# Altium PCB Microprocessor Module (328).PcbDoc
Units mil, origin at the board's own origin, x right, y up, seen from the top; angles counter-clockwise.
Board outline 3176.85 x 3001.61 mil, 2 copper layers (Top Layer, Bottom Layer); 28 components, 41 nets, 148 pads, 5 vias.
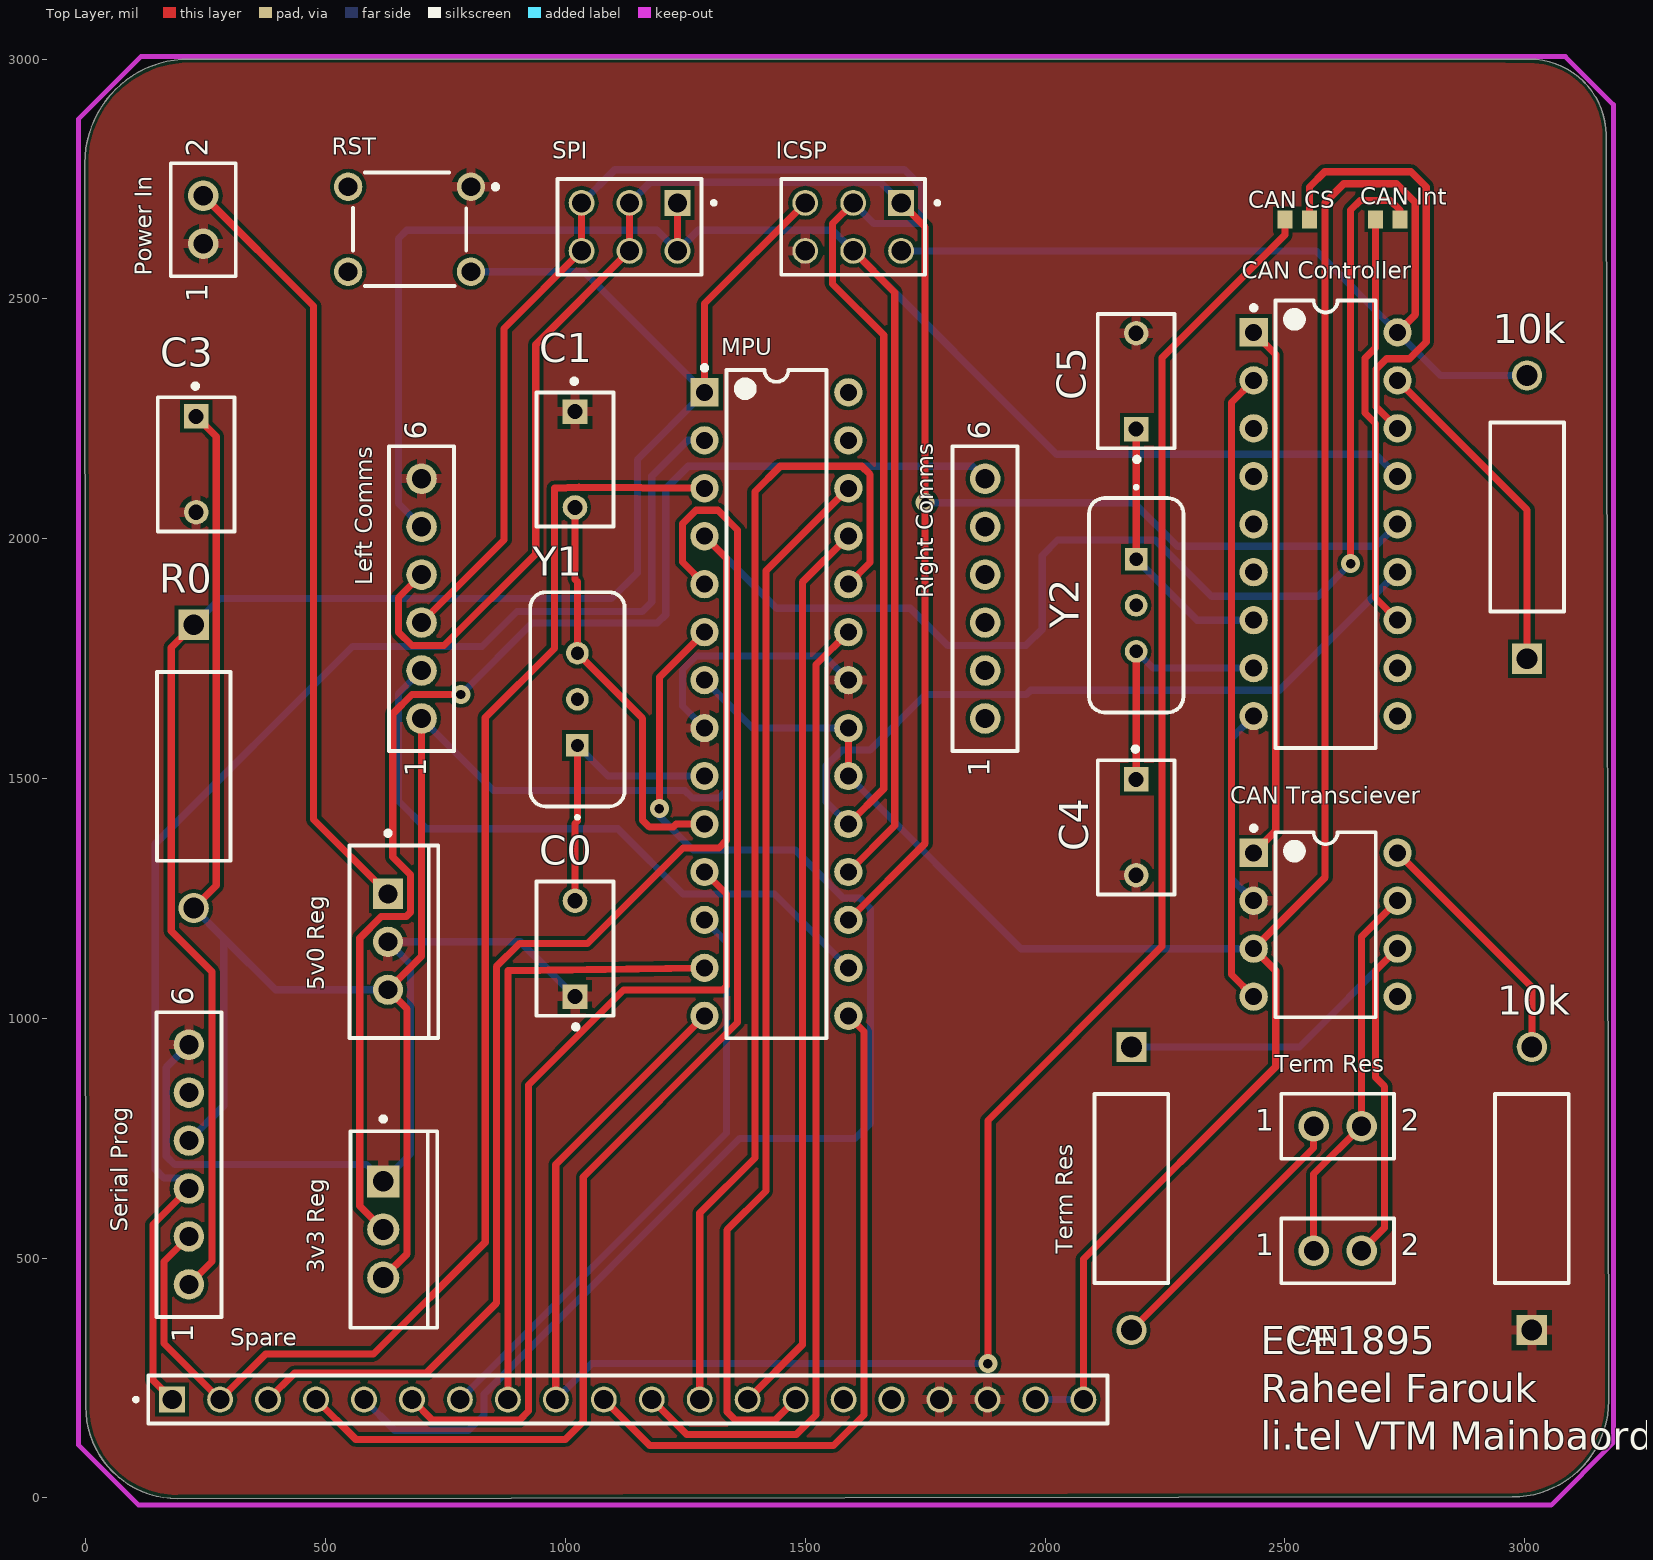
[diagram p0: Top Layer view]
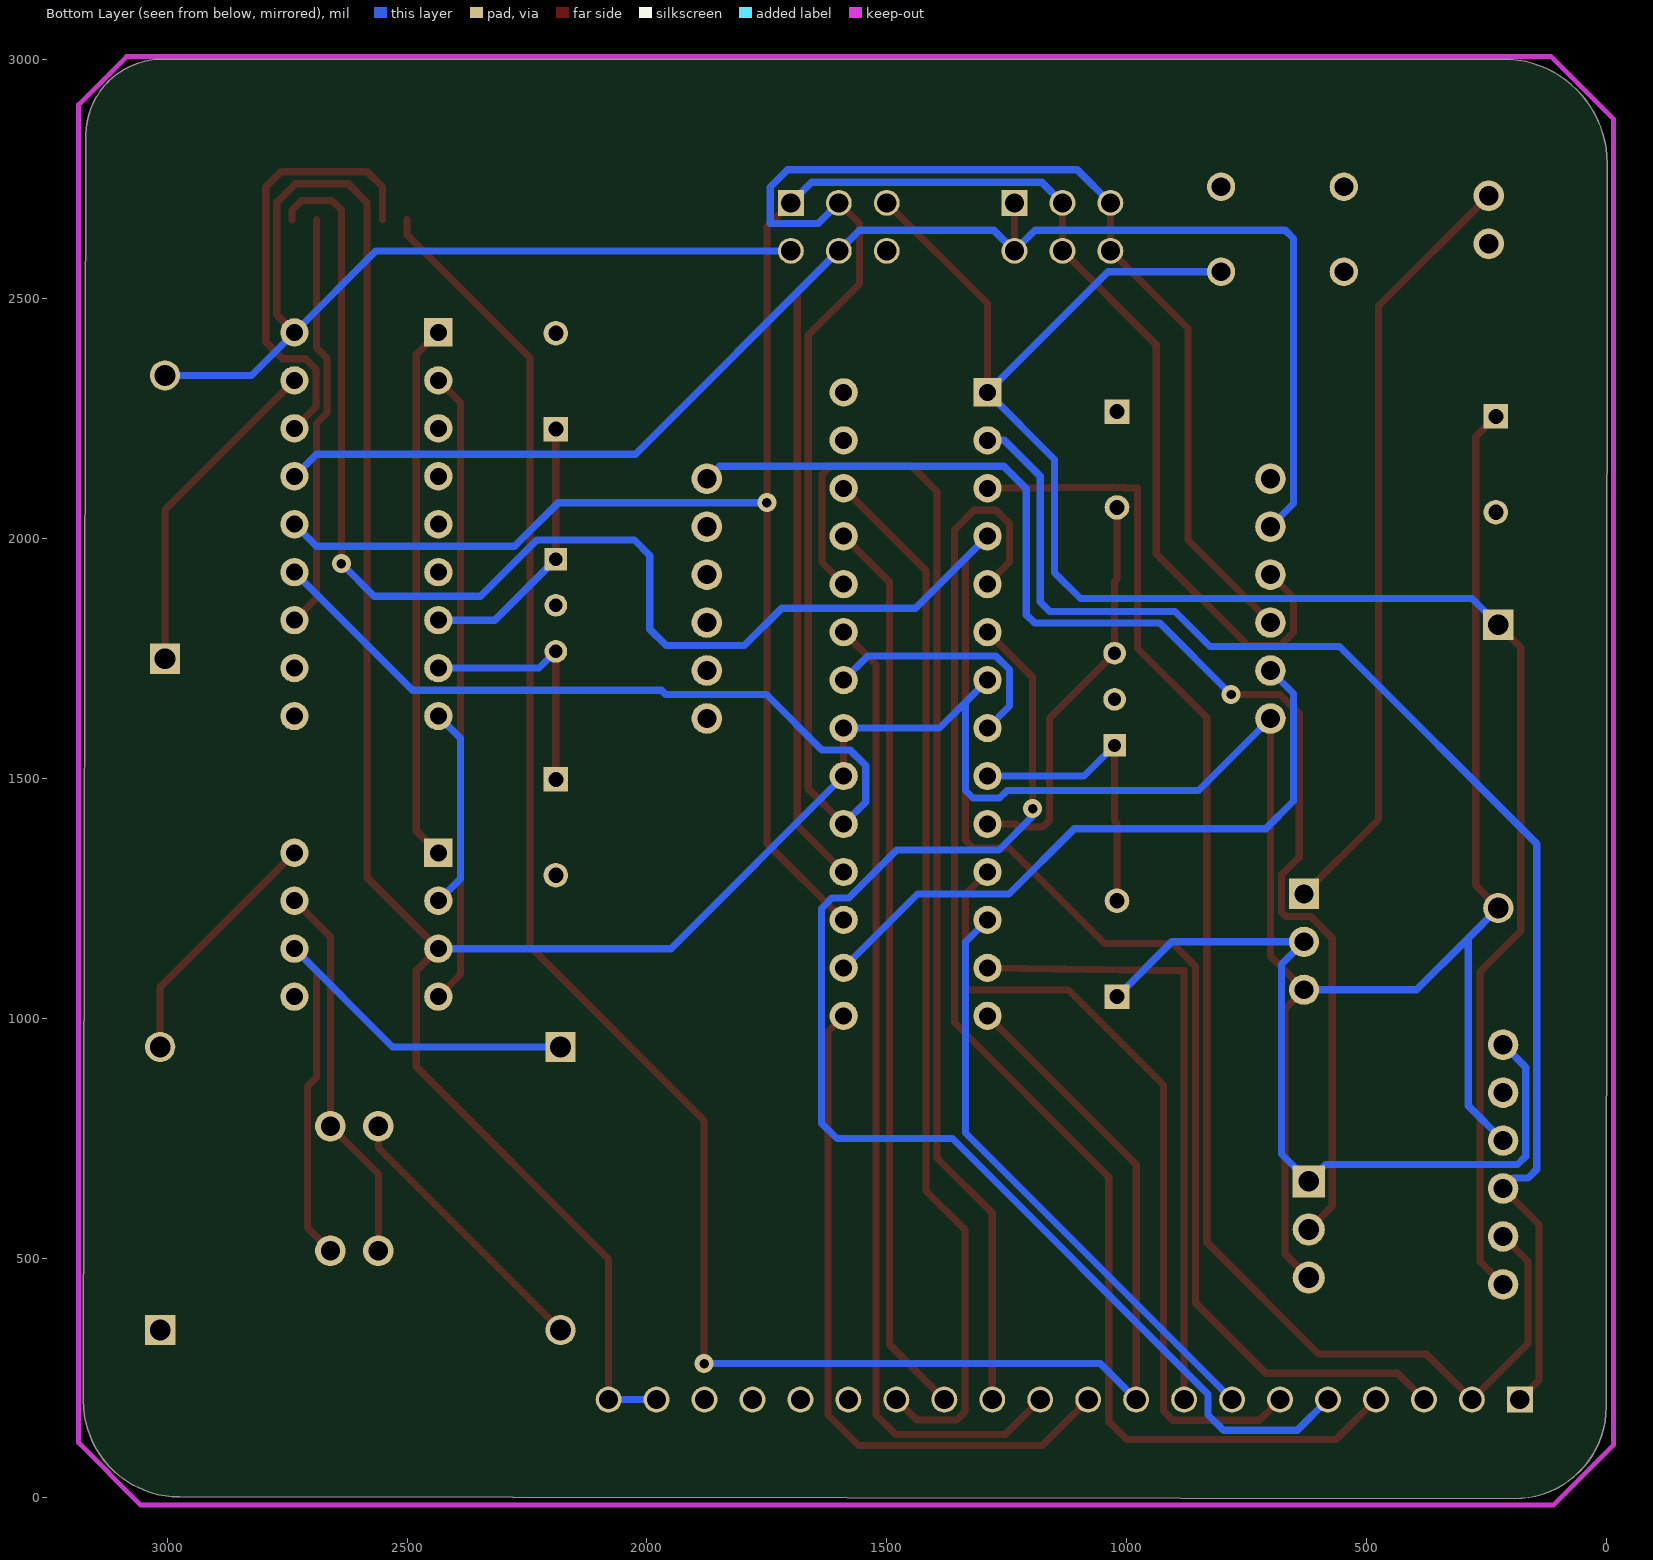
[diagram p1: Bottom Layer view, seen from below]

## Layer stack, top to bottom
Top Solder: solder mask 0.4, Solder Resist, Dk 3.5
Top Layer: signal copper 1.4
Dielectric 1: dielectric 12.6, FR-4, Dk 4.8
Bottom Layer: signal copper 1.4
Bottom Solder: solder mask 0.4, Solder Resist, Dk 3.5

## Board outline
0,190 ccw(c191.61,190) 191.61,-1.61 2974.63,1.85 ccw(c2974.63,202.22) 3175,202.22 3175.02,202.22 3170.07,2842.15 ccw(c3010.18,2839.78) 3010.18,2999.69 2960,3000 215.1,3000 ccw(c215.1,2783.07) -1.83,2783.07

## Design rules (kind name [scope] priority, off if disabled: settings)
BoardOutlineClearance [All] p1: gap=7.87 ignorepadtopadclearanceinfootprint=FALSE except(15.75: Arc-SplitBarrior Arc-SplitContinuation Track-SplitBarrior Track-SplitContinuation SMDPad-SplitBarrior SMDPad-SplitContinuation THPad-SplitBarrior THPad-SplitContinuation Via-SplitBarrior Via-SplitContinuation Fill-SplitBarrior Fill-SplitContinuation Poly-SplitBarrior Poly-SplitContinuation Region-SplitBarrior Region-SplitContinuation Text-SplitBarrior Text-SplitContinuation)
Clearance "Clearance Bottom Layer" [OnLayer('Bottom Layer')] p1: gap=8 ignorepadtopadclearanceinfootprint=TRUE except(10: Arc-Text Track-Text SMDPad-Text THPad-Text Via-Text Fill-Text Poly-Text Region-Text Text-Text)
Clearance "Clearance Top Layer" [OnLayer('Top Layer')] p2: gap=8 ignorepadtopadclearanceinfootprint=TRUE except(10: Arc-Text Track-Text SMDPad-Text THPad-Text Via-Text Fill-Text Poly-Text Region-Text Text-Text)
Clearance [All] p3: gap=7.87 ignorepadtopadclearanceinfootprint=FALSE except(3.5: Arc-Arc Arc-Track Arc-SMDPad Track-Track Track-SMDPad SMDPad-SMDPad; 5: Arc-Via Track-Via SMDPad-Via THPad-Via Via-Via; 10: Arc-Text Track-Text SMDPad-Text THPad-Text Via-Text Fill-Text Poly-Text Region-Text Text-Text)
HoleSize [All] p1: absolutevalues=TRUE maxlimit=248.03 minlimit=7.87 maxpercent=80.000 minpercent=20.000
MinimumAnnularRing [All] p1: minimumring=3
MinimumSolderMaskSliver [All] p1: minsoldermaskwidth=3.94
PolygonConnect PolygonConnect_1 [All] p1: thpad.connectstyle=Relief thpad.reliefconductorwidth=20 thpad.reliefentries=4 thpad.polygonreliefangle="90 Angle" thpad.airgapwidth=10 smdpad.connectstyle=Relief smdpad.reliefconductorwidth=20 smdpad.reliefentries=4 smdpad.polygonreliefangle="90 Angle" smdpad.airgapwidth=10 via.connectstyle=Direct via.reliefconductorwidth=20 via.reliefentries=4 via.polygonreliefangle="90 Angle" via.airgapwidth=10
RoutingCorners [All] p1: cornerstyle=Round minsetback=100 maxsetback=100
RoutingVias [All] p1: holewidth=19.68 width=39.37 viastyle="Through Hole" minholewidth=7.87 minwidth=17.72 maxholewidth=39.37 maxwidth=78.74
SilkToSilkClearance [All] p1: silktosilkclearance=3.94
SilkToSolderMaskClearance [IsPad] p1: minsilkscreentomaskgap=3.94 clearancetoexposedcopper=TRUE
SolderMaskExpansion [All] p1: expansion=4 istentingtop=FALSE
Width [All] p1: maxlimit=100 minlimit=3.5 preferedwidth=15
25 further rules are at their usual default settings.

## Classes and differential pairs
component class "Microprocessor Module (328)": "3v3 Reg" "5v0 Reg" 10k C0 C1 C3 C4 C5 CAN "CAN Controller" "CAN CS" "CAN Int" "CAN Transciever" ICSP "Left Comms" MPU "Power In" R0 "Right Comms" RST "Serial Prog" Spare SPI "Term Res" Y1 Y2

## Components (designator, comment, footprint, x,y, rotation, side; value= is the part's Value field where it differs from the comment)
"3v3 Reg" "LD1117V33" STM-TO220-3 620.16,559.61 r0 top
"5v0 Reg" "LM7805CT" FAIR-TO-220-3 630,1159.37 r0 top
10k "10k" VISH-A1-2_V2 3005,2045 r90 top
10k "10k" VISH-A1-2_V2 3015,645 r90 top
C0 "22pf" KEMT-C330C105M5U5TA 1020,1145 r90 top
C1 "22pf" KEMT-C330C105M5U5TA 1020,2165 r270 top
C3 ".1uF" KEMT-C330C105M5U5TA 230,2155 r270 top
C4 "27pf" KEMT-C330C105M5U5TA 2190,1398.19 r270 top
C5 "27pf" KEMT-C330C105M5U5TA 2190,2328.19 r90 top
CAN "SAMTEC-TSW-102-07-X-SJ" SAMTEC-TSW-102-07-X-S 2610,515 r0 top
"CAN Controller" "MCP2515-E/P" PDIP300-P18 2585,2030 r0 top
"CAN CS" "0R" RESC1609X50X30NL8T20 2525.59,2665 r0 top
"CAN Int" "0R" RESC1609X50X30NL8T20 2714.41,2665 r180 top
"CAN Transciever" "MCP2551-E/P" PDIP300-P8 2585,1195 r0 top
ICSP "TSW-103-07-F-D" SAMTEC_TSW-103-07-F-D 1600,2650 r180 top
"Left Comms" "SAMTEC-TSW-106-07-X-SJ" SAMTEC-TSW-106-07-X-S 700,1875 r90 top
MPU "ATmega328P-PU" 28P3 1440,1655 r0 top
"Power In" "SAMTEC-TSW-102-07-X-SJ" SAMTEC-TSW-102-07-X-S 245,2665 r90 top
R0 "10k" VISH-A1-2_V2 225,1525 r270 top
"Right Comms" "SAMTEC-TSW-106-07-X-SJ" SAMTEC-TSW-106-07-X-S 1875,1875 r90 top
RST "TL1105SPF160Q" ESWI-TL1105SPF_V 675,2645 r180 top
"Serial Prog" "SAMTEC-TSW-106-07-X-SJ" SAMTEC-TSW-106-07-X-S 215,695 r90 top
Spare "TSW-120-05-G-S" SAMTEC_TSW-120-05-G-S 180,205 r0 top
SPI "TSW-103-07-F-D" SAMTEC_TSW-103-07-F-D 1133.73,2650 r180 top
"Term Res" "120R" VISH-A1-2_V2 2180,645 r270 top
"Term Res" "SAMTEC-TSW-102-07-X-SJ" SAMTEC-TSW-102-07-X-S 2610,775 r0 top
Y1 "16MHz" ECS-4X-3IL 1025,1665 r90 top
Y2 "8MHz" ECS-4X-3IL 2190,1861.06 r270 top

## Footprints (in the part's own frame and the unit in brackets; to place one, negate y for a bottom-side part, rotate by r counter-clockwise, add the part's x,y. Pads: shape width x height; smd on the part's side, far side on the other; paste and mask are expansions set on the pad)
28P3 [mm] "28-Pin Plastic Dual In-Line Package (PDIP)"
  rect 1.5x1.5 hole 0.9: 1(-3.81,16.51)
  round 1.5 hole 0.9: 2(-3.81,13.97) 3(-3.81,11.43) 4(-3.81,8.89) 5(-3.81,6.35) 6(-3.81,3.81) 7(-3.81,1.27) 8(-3.81,-1.27) 9(-3.81,-3.81) 10(-3.81,-6.35) 11(-3.81,-8.89) 12(-3.81,-11.43) 13(-3.81,-13.97) 14(-3.81,-16.51) 15(3.81,-16.51) 16(3.81,-13.97) 17(3.81,-11.43) 18(3.81,-8.89) 19(3.81,-6.35) 20(3.81,-3.81) 21(3.81,-1.27) 22(3.81,1.27) 23(3.81,3.81) 24(3.81,6.35) 25(3.81,8.89) 26(3.81,11.43) 27(3.81,13.97) 28(3.81,16.51)
  silkscreen extent -3.93,-17.7 2.65,17.93, body extent -3.6,-17.65 3.6,17.65, height 4.58
ECS-4X-3IL [mm]
  rect 1.2x1.2 hole 0.7: 1(-2.44,0)
  round 1.2 hole 0.7: 2(0,0) 3(2.44,0)
  silkscreen extent -6.34,-2.5 5.68,2.5, body extent -5.68,-2.5 5.68,2.5, height 3.5
ESWI-TL1105SPF_V [mm] "THD, 4-Leads, Body 6x6mm"
  round 1.5 hole 1: 1(-3.25,-2.25) 2(3.25,-2.25) 3(-3.25,2.25) 4(3.25,2.25)
  silkscreen extent -4.68,-3 3,3, body extent -3.95,-3 3.95,3, height 7.4
FAIR-TO-220-3 [mm] "FM, 3-Leads, Body 10.2x4.7mm, Pitch 2.54mm"
  rect 1.6x1.6 hole 1: 1(0,2.54)
  round 1.6 hole 1: 2(0,0) 3(0,-2.54)
  silkscreen extent -2.04,-5.1 2.66,5.87, body extent -2.04,-5.1 2.66,5.1, height 18.95
KEMT-C330C105M5U5TA [mm] "THD, 2-Leads, Body 7.11x4.07mm"
  rect 1.3x1.3 hole 0.8: 1(-2.54,0)
  round 1.3 hole 0.8: 2(2.54,0)
  silkscreen extent -4.27,-2.04 3.55,2.03, body extent -3.55,-2.03 3.55,2.03, height 9.14
PDIP300-P8 [mm] "8-Pin Plastic Dual In-Line Package (PDIP)"
  rect 1.5x1.5 hole 0.9: 1(-3.81,3.81)
  round 1.5 hole 0.9: 2(-3.81,1.27) 3(-3.81,-1.27) 4(-3.81,-3.81) 5(3.81,-3.81) 6(3.81,-1.27) 7(3.81,1.27) 8(3.81,3.81)
  silkscreen extent -3.93,-4.9 2.65,5.23, body extent -3.55,-4.9 3.55,4.9, height 4.32
PDIP300-P18 [mm] "DIP, 18-Pin, Row Spacing 7.62 mm, Pitch 2.54 mm"
  rect 1.5x1.5 hole 0.9: 1(-3.81,10.16)
  round 1.5 hole 0.9: 2(-3.81,7.62) 3(-3.81,5.08) 4(-3.81,2.54) 5(-3.81,0) 6(-3.81,-2.54) 7(-3.81,-5.08) 8(-3.81,-7.62) 9(-3.81,-10.16) 10(3.81,-10.16) 11(3.81,-7.62) 12(3.81,-5.08) 13(3.81,-2.54) 14(3.81,0) 15(3.81,2.54) 16(3.81,5.08) 17(3.81,7.62) 18(3.81,10.16)
  silkscreen extent -3.93,-11.85 2.65,11.85, body extent -3.6,-11.8 3.6,11.8, height 5.33
RESC1609X50X30NL8T20 [mm] "Chip Resistor, 2-Leads, Body 1.65x0.95mm, IPC Medium Density"
  rect 0.8x0.95 smd: 1(-0.65,0) 2(0.65,0)
  body extent -0.82,-0.48 0.82,0.48, height 0.5
SAMTEC-TSW-102-07-X-S [mm]
  round 1.62 hole 1.02: 1(-1.27,0) 2(1.27,0)
  silkscreen extent -2.99,-1.72 2.99,1.72
SAMTEC-TSW-106-07-X-S [mm]
  round 1.62 hole 1.02: 1(-6.35,0) 2(-3.81,0) 3(-1.27,0) 4(1.27,0) 5(3.81,0) 6(6.35,0)
  silkscreen extent -8.07,-1.72 8.07,1.72
SAMTEC_TSW-103-07-F-D [mm]
  rect 1.37x1.37 hole 1.02: 01(-2.54,-1.27)
  round 1.37 hole 1.02: 02(-2.54,1.27) 03(0,-1.27) 04(0,1.27) 05(2.54,-1.27) 06(2.54,1.27)
  silkscreen extent -4.56,-2.54 3.81,2.54
SAMTEC_TSW-120-05-G-S [mm]
  rect 1.37x1.37 hole 1.02: 01(0,0)
  round 1.37 hole 1.02: 02(2.54,0) 03(5.08,0) 04(7.62,0) 05(10.16,0) 06(12.7,0) 07(15.24,0) 08(17.78,0) 09(20.32,0) 10(22.86,0) 11(25.4,0) 12(27.94,0) 13(30.48,0) 14(33.02,0) 15(35.56,0) 16(38.1,0) 17(40.64,0) 18(43.18,0) 19(45.72,0) 20(48.26,0)
  silkscreen extent -2.02,-1.27 49.53,1.27
STM-TO220-3 [mm] "FM, 3-Leads, Body 10.4x4.6mm, Pitch 2.55mm"
  rect 1.7x1.7 hole 1.1: 1(0,2.55)
  round 1.7 hole 1.1: 2(0,0) 3(0,-2.55)
  silkscreen extent -1.74,-5.2 2.86,5.97, body extent -1.74,-5.2 2.86,5.2, height 19.68
VISH-A1-2_V2 [mm] "Through Hole, 2-Leads, Dia 3.9mm, Body Length 10mm, Pin Spacing 15mm"
  rect 1.6x1.6 hole 1.1: 1(-7.5,0)
  round 1.6 hole 1.1: 2(7.5,0)
  silkscreen extent -5,-1.95 5,1.95, body extent -7.91,-1.95 7.92,1.95, height 3.88

## Part data
"3v3 Reg": library part CMP-019-00020-2, "Low Drop Positive Voltage Regulator, 800 mA, Fixed 3.3 V Output, 0 to 125 degC, 3-Pin TO-220, RoHS, Tube", Case/Package=TO-220-3, Dropout Voltage=1.1V, Manufacturer=STMicroelectronics, Max Input Voltage=15V, Max Operating Temperature=125°C, Max Ouput Current=800mA, Min Input Voltage=4.4V, Min Operating Temperature=0°C, Min Supply Voltage=4.75V, Nominal Output Voltage=3.3V, Output Current=1.3A, Package Quantity=50, Power=12W, Datasheet URL=http://www.farnell.com/datasheets/1776449.pdf, Datasheet Version="Rev. A, 07/2003", Manufacturer URL=http://www.st.com/, Max Supply Voltage=15V, Output Voltage=3.3V, Outputs=1, Packaging=Rail/Tube, Pins=3, RoHS Compliant=True
"5v0 Reg": library part CMP-2000-04938-1, "Positive Voltage Regulator, 5 V, 1 A, -40 to 125 degC, 3-Pin TO-220, RoHS, Tube", Manufacturer=FairchildSemiconductor, Maximum Input Voltage=35V, Maximum Output Current=2.2(Typ)A, Maximum Quiescent Current=8mA, Operating Temperature=-40to125degC, Output Voltage=5V, Package=3TO-220AB, Package Description="3-Pin Through Hole Device, Body 10 x 4.5 mm, Pitch 2.54 mm", Package Reference=TO-220, Typical Dropout Voltage @ Current=2@1AV, Accuracy=±4%, Category=LinearRegulator, Datasheet URL=https://datasheet.ciiva.com/26904/lm7805ct-26904988.pdf, Datasheet Version=Aug-12, Line Regulation=100mV, Load Regulation=100mV, Manufacturer URL=https://www.fairchildsemi.com/, Mounting=ThroughHole, Number of Outputs=1, Output Type=Fixed, Package URL=https://www.fairchildsemi.com/package-drawings/TO/TO220B03.pdf, Packaging=Rail/Tube, Polarity=Positive, Rad Hard=No, Type=Linear
10k 10k R0 "Term Res": library part CMP-1240-00001-1, "Power Metal Film Leaded Resistor, 62 KOhm +/-5%, 2 W, 2-Pin THD, RoHS, Ammo Pack", Manufacturer="Vishay Semiconductor", PartNumber=PR02000206202JA100, Power="2 W", Resistance="62 KOhm", Temperature Coefficient="+/-250 ppm/degC", Tolerance=+/-5%, ComponentLink1Description="Manufacturer URL", ComponentLink1URL=http://www.vishay.com/, ComponentLink2Description=Datasheet, ComponentLink2URL=http://www.vishay.com/docs/28729/28729.pdf, ComponentLink3Description="Package Specification", ComponentLink3URL=http://www.vishay.com/docs/28729/28729.pdf, DatasheetVersion=Jun-13, Mounting Technology="Through Hole", PackageDescription="2-Pin Axial Lead, Body 10 x 3.9 mm", Packing="Ammo Pack", RoHS=TRUE
C0 C1 C3 C4 C5: library part CMP-2000-06056-1, "Ceramic Capacitor, 1 uF, +/- 20%, 50 V, -10 to 85 degC, 2-Pin THD, RoHS, Bulk", Capacitance=1µF, Manufacturer=Kemet, Operating Temperature=10°C~85°C, Package / Case=Radial, Package Description="2-Pin Through Hole Device, Body 7.11 x 4.07 mm", Package Reference=C330C105M5U5TA, Ratings=-, Standard Package=250, Temperature Coefficient=Z5U, Tolerance=±20%, Voltage - Rated=50V, Applications=GeneralPurpose, Catalog Drawings=C330(std), Category=Capacitors, Datasheet URL=http://www.kemet.com/Lists/ProductCatalog/Attachments/599/KEM_C1051_GOLDMAX_Z5U.pdf, Datasheet Version=12/2015, Family=CeramicCapacitors, Features=-, Height - Seated (Max)="0.360\"(9.14mm)", Lead Spacing="0.200\"(5.08mm)", Lead Style=Straight, Manufacturer URL=http://www.kemet.com/, Mounting Technology=ThroughHole, Mounting Type=ThroughHole, Online Catalog=GoldenMax™Series, Other Names=399-4390, Packaging=Bulk, PCN Design/Specification=C3yySeriesGoldenMaxLeadConfiguration02/Feb/2015, Product Training Modules=CapacitorBasics-TypicalUsesforCapacitors, Series=GoldenMax™, Size / Dimension="0.300\"Lx0.150\"W(7.62mmx3.81mm)", Thickness (Max)=-
"CAN Controller": library part CMP-0186-00008-2, "Stand-Alone CAN Controller With SPI Interface, 18-Pin PDIP, Extended Temperature", Code_JEDEC=MS-001, ComponentLink1Description="Manufacturer URL", ComponentLink1URL=http://www.microchip.com/, ComponentLink2Description=Datasheet, ComponentLink2URL=http://ww1.microchip.com/downloads/en/DeviceDoc/21801f.pdf, ComponentLink3Description="Package Specification", ComponentLink3URL=http://www.microchip.com/stellent/groups/techpub_sg/documents/packagingspec/en012702.pdf, DatasheetVersion="revF, Oct-2010", PackageDescription="18-Lead Plastic Dual In-Line (P) - 300 mil Body [PDIP]", PackageReference=PDIP300-P18, PackageVersion="revBB, Aug-2009", RevisionNote="URLs added. DatasheetVersion updated."
"CAN CS" "CAN Int": library part CMP-2000-03816-5, "Chip Resistor, 0 Ohm, Jumper, 100 mW, -55 to 155 degC, 0603 (1608 Metric), RoHS, Tape and Reel", Manufacturer="Vishay Semiconductor", Max Operating Temperature="155 degC", Min Operating Temperature="-55 degC", Package Quantity=5000, Voltage Rating="75 V", ComponentLink1Description="Manufacturer URL", ComponentLink1URL=http://www.vishay.com/, ComponentLink2Description=Datasheet, ComponentLink2URL=http://www.vishay.com/docs/20035/dcrcwe3.pdf, DatasheetVersion=06/2012, Height="0.45 mm", Length="1.55 mm", Mount="Surface Mount", Mounting Technology="Surface Mount", PackageDescription="2-Pin Surface Mount Device, Body 1.575 x 0.85 mm", PackageReference=0603, Packaging="Tape and Reel", Pins=2, REACH SVHC=Unknown, RoHSCompliant=true
"CAN Transciever": library part CMP-0186-00100-2, "High-Speed CAN Transceiver, 8-Pin PDIP, Extended Temperature", Code_JEDEC=MS-001, ComponentLink1Description="Manufacturer URL", ComponentLink1URL=http://www.microchip.com/, ComponentLink2Description=Datasheet, ComponentLink2URL=http://ww1.microchip.com/downloads/en/DeviceDoc/21667F.pdf, ComponentLink3Description="Package Specification", ComponentLink3URL=http://www.microchip.com/stellent/groups/techpub_sg/documents/packagingspec/en012702.pdf, DatasheetVersion="revF, Jul-2010", PackageDescription="8-Lead Plastic Dual In-Line (P) - 300 mil Body [PDIP]", PackageReference=PDIP300-P8, PackageVersion="revBB, Aug-2009", RevisionNote="URLs added. DatasheetVersion updated."
ICSP Spare SPI: Package=None, Availability=Unavailable, Price=None
  ICSP SPI: MF=Samtec, MP=TSW-103-07-F-D
  Spare: MP=TSW-120-05-G-S
MPU: library part CMP-0095-00013-2, "8-bit AVR Microcontroller, 32KB Flash, 1KB EEPROM, 2KB SRAM, 28-pin PDIP, Industrial Grade (-40°C to 85°C)", ComponentLink1Description="Manufacturer URL", ComponentLink1URL=http://www.atmel.com/, ComponentLink2Description="ATmega48A/48PA/88A/88PA/168A/168PA/328/328P Datasheet", ComponentLink2URL=http://www.atmel.com/dyn/resources/prod_documents/8271.pdf, ComponentLink3Description="ATmega48A/48PA/88A/88PA/168A/168PA/328/328P Summary", ComponentLink3URL=http://www.atmel.com/dyn/resources/prod_documents/8271S.pdf, DatasheetVersion="revD, May-2011", PackageDescription="28-lead (0.300\"/7.62mm Wide) Plastic Dual Inline Package (PDIP)", PackageReference=28P3, PackageVersion="revB, Sep-2001", RevisionNote="DatasheetVersion updated. URLs added."
RST: library part CMP-2000-07248-1, "Tact Switch, SPST-NO, 50 mA, 12 VDC, -20 to 70 degC, 4-Pin THD, RoHS, Bulk", Manufacturer=E-Switch, Package Description="4-Pin Through Hole Device, Body 6 x 6 mm", Package Reference=TL1105SPF, Actuation Force=1.6N, Actuator Style=RoundButton, Contact Material=Silver, Datasheet URL=https://www.e-switch.com/system/asset/product_line/data_sheet/140/TL1105.pdf, Datasheet Version=12/2013, Manufacturer URL=http://www.e-switch.ch/en/, Mounting Technology=ThroughHole, Package URL=http://spec_sheets.e-switch.com/specs/P010201.pdf, Size=6x6mm, Termination Style=RightAngle
Y1 Y2: library part CMP-1669-00002-2, "CRYSTAL 8.00 MHZ 20PF 49US", Manufacturer=ECS, PartNumber=ECS-80-20-4X, ComponentLink1Description=Datasheet, ComponentLink1URL=http://www.ecsxtal.com/store/pdf/hc-49usx.pdf, PackageReference=4X-3IL

## Via types
v1: diameter 39.37, hole 19.68, Top Layer to Bottom Layer, 5 vias

## Nets (pads, with @x,y where several pads share a name; then routed paths per layer and width w, separated by ;. In a path a pad name is that pad's centre, name@x,y a point inside that pad or via, vN(x,y) a via of type N, cw(c..) or ccw(c..) an arc to the next point about the centre after c; other vN are vias at no path point)
3v3: "3v3 Reg.2" "Right Comms.6" | length 2798.8
  Top Layer w15: 620.16,559.61 571,608.76 571,1167 616,1212 668,1212 677,1221 677,1299 640,1336 640,1635 680,1675 v1(782,1675)
  Bottom Layer w15: v1(782,1675) 931.38,1824.38 1192,1824.38 1209,1841.38 1209,2104 1256,2151 1849,2151 1875,2125
A0: MPU.23 Spare.11 | length 2049.3
  Top Layer w15: Spare.11 1252.59,132.41 1481.88,132.41 1522.47,173 1522.47,1737.47 MPU.23
A1: MPU.24 Spare.12 | length 2457.3
  Top Layer w15: Spare.12 1280,593.81 1395,708.81 1395,2098 1448,2151 1618.03,2151 1635.03,2134 1635.03,1950.03 MPU.24
A2: MPU.25 Spare.13 | length 1887
  Top Layer w15: Spare.13 1494,319 1494,1909 MPU.25
A3: MPU.26 Spare.14 | length 2197.9
  Top Layer w15: Spare.14 1437.53,162.53 1354,162.53 1337,179.53 1337,558.81 1418,639.81 1418,1933 MPU.26
A4: Spare.15
A5: Spare.16
CAN_CS: "CAN Controller.16" "CAN CS.2" | length 931.6
  Top Layer w15: 2551.18,2665 2551.18,2733 2583.18,2765 2763,2765 2795,2733 2795,2410.03 2760,2375.03 2712,2375.03 2689.97,2353 2689.97,2275.03 2735,2230
CAN_INT: "CAN Controller.12" "CAN Int.2" | length 872.2
  Top Layer w15: 2688.82,2665 2688.82,2398.03 2666.97,2376.18 2666.97,2261.97 2688.82,2240.13 2688.82,1876.18 2735,1830
CAN_MISO: "CAN Controller.15" "Left Comms.5" ICSP.04 MPU.18 SPI.01 SPI.02 | length 4430
  Top Layer w15: SPI.02 SPI.01 ; MPU.18 1686.65,1401.65 1686.65,2513.35 ICSP.04
  Bottom Layer w15: 700,2025 652,2073 652,2626 669,2643 1190.73,2643 SPI.02 1276.73,2643 1557,2643 ICSP.04 2024,2176 2689,2176 2735,2130
CAN_MOSI: "CAN Controller.14" "Left Comms.4" ICSP.01 MPU.17 SPI.03 SPI.04 | length 4555.3
  Top Layer w15: 700,1925 652,1877 652,1805 680,1777 747,1777 938,1968 938,2404.27 SPI.04 SPI.03 ; MPU.17 1750,1365 v1(1750,2075) 1750,2650 ICSP.01
  Bottom Layer w15: SPI.03 1176.73,2743 1657,2743 ICSP.01 ; v1(1750,2075) 2185,2075 2276,1984 2689,1984 2735,2030
CAN_RX: "CAN Controller.2" "CAN Transciever.4" | length 1323.1
  Top Layer w15: 2435,1045 2389,1091 2389,2284 2435,2330
CAN_SCK: "CAN Controller.13" "Left Comms.3" ICSP.03 MPU.19 SPI.05 SPI.06 | length 4889.3
  Top Layer w15: 700,1825 872,1997 872,2438.27 SPI.06 SPI.05 ; MPU.19 1663.65,1478.65 1663.65,2424.35 1557,2531 1557,2657 ICSP.03
  Bottom Layer w15: SPI.05 1102.73,2769 1707,2769 1743,2733 1743,2657 1643,2657 ICSP.03 ; MPU.19 1544,1451 1544,1527 1576,1559 1635,1559 1751,1675 1961,1675 1970,1684 2489,1684 2735,1930
CAN_TX: "CAN Controller.1" "CAN Transciever.1" | length 1123.1
  Top Layer w15: 2435,1345 2481,1391 2481,2384 2435,2430
CANH: "CAN Transciever.6" "Term Res.1"@2180,940.28 CAN.2 | length 1316.6
  Top Layer w15: CAN.2 2708,563 2708,858 2689,877 2689,1099 2735,1145
  Bottom Layer w15: 2180,940.28 2530.28,940.28 2735,1145
CANL: "CAN Transciever.7" "Term Res.2"@2660,775 CAN.1 | length 802.5
  Top Layer w15: CAN.1 2560,675 2660,775 2660,1170 2735,1245
CS: "Left Comms.2" MPU.16 | length 1374
  Bottom Layer w15: 700,1725 652,1677 652,1453 710,1395 1109,1395 1245,1259 1436,1259 MPU.16
D0: "Serial Prog.3" MPU.2 Spare.01 | length 2900.6
  Top Layer w15: Spare.01 140,245 140,570 215,645
  Bottom Layer w15: 215,645 193.13,666.87 162.74,666.87 144.61,685 144.61,1363.61 556,1775 826,1775 899,1848 1160,1848 1180,1868 1180,2130 1255,2205 MPU.2
D1: "Serial Prog.2" MPU.3 Spare.02 | length 3043.6
  Top Layer w15: 215,545 163,493 163,322 Spare.02 375,300 600,300 833,533 833,1627 977,1771 977,2105 1028,2107 MPU.3
D2: "CAN Int.1" MPU.4 Spare.03 | length 5079.2
  Top Layer w15: Spare.03 435,260 710,260 856,406 856,1108 904,1156 1046,1156 1245,1355 1320,1355 1336,1371 1336,1959 MPU.4 ; v1(2637,1948) 2637,2685 2657,2705 2720,2705 2740,2685 2740,2665
  Bottom Layer w15: MPU.4 1440,1855 1719,1855 1797,1777 1960,1777 1994,1811 1994,1965 2026,1997 2230,1997 2347,1880 2569,1880 v1(2637,1948)
D3: MPU.5 Spare.04 | length 2887.7
  Top Layer w15: Spare.04 563,122 1000,122 1037,159 1037,669 1359,991 1359,2018 1318,2059 1272,2059 1244,2031 1244,1951 MPU.5
D4: MPU.6 Spare.05 | length 2763.3
  Top Layer w15: v1(1196,1436.97) 1196,1711 MPU.6
  Bottom Layer w15: Spare.05 644,141 798,141 830,173 830,216 1363,749 1604,749 1636,781 1636,1229 1614,1251 1579,1251 1479,1351 1266,1351 1196,1421 v1(1196,1436.97)
D5: MPU.11 Spare.06 | length 1704.1
  Top Layer w15: Spare.06 723,162 904,162 923,181 923,861 1121,1059 1328,1059 1336,1067 1336,1259 MPU.11
D6: MPU.12 Spare.07 | length 1249.4
  Bottom Layer w15: Spare.07 1336,761 1336,1159 MPU.12
D7: MPU.13 Spare.08 | length 1304
  Top Layer w15: Spare.08 880,1099 MPU.13
D8: "CAN CS.1" MPU.14 Spare.09 | length 4501.9
  Top Layer w15: Spare.09 980,695 MPU.14 ; v1(1881,280) 1881,787 2244,1150 2244,2377 2500,2633 2500,2665
  Bottom Layer w15: Spare.09 1055,280 v1(1881,280)
D9: MPU.15 Spare.10 | length 1453.9
  Top Layer w15: Spare.10 1175.59,109.41 1558.88,109.41 1622.47,173 1622.47,972.53 MPU.15
GND: 10k.1@3015,349.72 "3v3 Reg.1" "5v0 Reg.2" "CAN Controller.9" "CAN Transciever.2" "Left Comms.6" "Power In.1" "Serial Prog.6" C0.1 C1.1 C3.2 C4.2 C5.2 ICSP.06 MPU.8 MPU.22 RST.1 Spare.17 Spare.18 | length 2648.7
  Bottom Layer w15: 215,945 167.61,897.61 167.61,712.39 185,695 585.16,695 620.16,660 677,716.84 677,1112.37 630,1159.37 905.63,1159.37 C0.1 ; MPU.8 1244,1651 1244,1727 1272,1755 1540,1755 MPU.22 ; 2435,1245 2389,1291 2389,1584 2435,1630
Int: "Right Comms.1"
"Net5v0 Reg_1": "5v0 Reg.1" "Power In.2" | length 1615.1
  Top Layer w15: 245,2715 475,2485 475,1414.37 630,1259.37
Net10k_1: 10k.1@3005,1749.72 "CAN Controller.17" | length 692.1
  Top Layer w15: 2735,2330 3005,2060 10k.1@3005,1749.72
Net10k_2: 10k.2@3015,940.28 "CAN Transciever.8" | length 520.7
  Top Layer w15: 2735,1345 3015,1065 10k.2@3015,940.28
NetC0_2: C0.2 MPU.9 Y1.1 | length 617.5
  Top Layer w15: C0.2 1020,1406 1025,1411 Y1.1
  Bottom Layer w15: Y1.1 1088.94,1505 MPU.9
NetC1_2: C1.2 MPU.10 Y1.3 | length 848
  Top Layer w15: C1.2 1020,1915 1025,1910 Y1.3 1160.81,1625.25 1160.81,1413 1175,1398.81 1225,1398.81 1231.19,1405 MPU.10
NetC4_1: "CAN Controller.8" C4.1 Y2.3 | length 526.3
  Top Layer w15: C4.1 Y2.3
  Bottom Layer w15: Y2.3 2225,1730 2435,1730
NetC5_1: "CAN Controller.7" C5.1 Y2.1 | length 568.7
  Top Layer w15: Y2.1 C5.1
  Bottom Layer w15: Y2.1 2317.13,1830 2435,1830
"NetTerm Res_1": "Term Res.1"@2560,775 "Term Res.2"@2180,349.72 | length 582.7
  Top Layer w15: 2180,349.72 2560,729.72 2560,775
RESET: "Serial Prog.1" ICSP.05 MPU.1 R0.1 RST.3 | length 3927
  Top Layer w15: 215,445 263,493 263,1097 178,1182 178,1773.28 R0.1 ; MPU.1 1290,2490 ICSP.05
  Bottom Layer w15: R0.1 279.72,1875 1096,1875 1150,1929 1150,2165 MPU.1 1038.58,2556.42 RST.3
SCL: MPU.28
SDA: MPU.27
VCC: 10k.2@3005,2340.28 "3v3 Reg.3" "5v0 Reg.3" "CAN Controller.18" "CAN Transciever.3" "Left Comms.1" "Serial Prog.4" C3.1 ICSP.02 MPU.7 MPU.20 MPU.21 R0.2 Spare.19 Spare.20 | length 10314.8
  Top Layer w15: R0.2 272,1276.72 272,2213 C3.1 ; 620.16,459.21 670,509.05 670,1019.37 630,1059.37 700,1129.37 700,1625 ; MPU.20 MPU.21 ; Spare.20 2080,498 2481,899 2481,1099 2435,1145 2584,1294 2584,2701 2623,2740 2733,2740 2772,2701 2772,2467 2735,2430
  Bottom Layer w15: 215,745 287.7,817.7 287.7,1167.02 ; R0.2 287.7,1167.02 ; 630,1059.37 395.35,1059.37 287.7,1167.02 ; 700,1625 850,1475 1249,1475 1265,1459 1320,1459 1336,1475 1336,1659 ; MPU.7 1336,1659 ; MPU.20 1950,1145 2435,1145 ; MPU.21 1390,1605 1336,1659 ; ICSP.02 2565,2600 2735,2430 2824.72,2340.28 10k.2@3005,2340.28 ; Spare.19 Spare.20
pads on no net: "CAN Controller.3" "CAN Controller.4" "CAN Controller.5" "CAN Controller.6" "CAN Controller.10" "CAN Controller.11" "CAN Transciever.5" "Right Comms.2" "Right Comms.3" "Right Comms.4" "Right Comms.5" "Serial Prog.5" RST.2 RST.4 Y1.2 Y2.2

## Polygon pours and split planes (outlines as drawn)
GND on Top Layer "GND_L01_P000" (solid, pour order 0): 0,190 ccw(c191.61,190) 191.61,-1.61 2974.63,1.85 ccw(c2974.63,202.22) 3175,202.22 3175.02,202.22 3170.07,2842.15 ccw(c3010.18,2839.78) 3010.18,2999.69 2960,3000 215.1,3000 ccw(c215.1,2783.07) -1.83,2783.07

## Keep-outs
Keep-Out Layer:
  lines w10: -15,110 -15,2875 115,3005 3085,3005 3185,2905 3185,115 3055,-15 110,-15 -15,110

## Silkscreen, mask and mechanical layers (free items; w line width, h text height)
Top Overlay:
  text "ECE1895 / Raheel Farouk / li.tel VTM Mainbaord v0.1" at 2450,80 h100
Mechanical 1:
  lines w10: -1.83,2783.07 cw(c215.1,2783.07) 215.1,3000 2960,3000 3010.18,2999.69 cw(c3010.18,2839.78) 3170.07,2842.15 3175,199.06 cw(c2977.8,199.06) 2977.8,1.86 191.61,-1.61 cw(c191.61,190) 0,190 -1.83,2783.07

## Dimensions
1807.28,1557.28 to 767.72,1557.28 on Top Overlay

## Text inside footprints (layer, text, board x,y; h text height)
CAN: Top Overlay "1" at 2438.35,490 h77.5; Top Overlay "2" at 2741.14,490 h77.5; Mechanical 40 "2.540" at 2239.02,510 h15.5; Mechanical 40 "2.540" at 2456.5,640 h15.5; Mechanical 40 "5.080" at 2584.02,342.48 h15.5; Mechanical 16 "1" at 2438.35,490 h77.5; Mechanical 16 "2" at 2741.14,490 h77.5
"Left Comms": Top Overlay "1" at 725,1503.35 h77.5 r90; Top Overlay "6" at 725,2206.14 h77.5 r90; Mechanical 40 "2.540" at 705,1304.02 h15.5 r90; Mechanical 40 "2.540" at 632.52,1524.02 h15.5 r90; Mechanical 40 "15.240" at 872.52,1843.5 h15.5 r90; Mechanical 40 "12.700" at 575,1843.5 h15.5 r90; Mechanical 16 "1" at 725,1503.35 h77.5 r90; Mechanical 16 "6" at 725,2206.14 h77.5 r90
"Power In": Top Overlay "1" at 270,2493.35 h77.5 r90; Top Overlay "2" at 270,2796.14 h77.5 r90; Mechanical 40 "2.540" at 250,2294.02 h15.5 r90; Mechanical 40 "2.540" at 120,2511.5 h15.5 r90; Mechanical 40 "5.080" at 417.52,2639.02 h15.5 r90; Mechanical 16 "1" at 270,2493.35 h77.5 r90; Mechanical 16 "2" at 270,2796.14 h77.5 r90
"Right Comms": Top Overlay "1" at 1900,1503.35 h77.5 r90; Top Overlay "6" at 1900,2206.14 h77.5 r90; Mechanical 40 "2.540" at 1880,1304.02 h15.5 r90; Mechanical 40 "2.540" at 1807.52,1524.02 h15.5 r90; Mechanical 40 "15.240" at 2047.52,1843.5 h15.5 r90; Mechanical 40 "12.700" at 1750,1843.5 h15.5 r90; Mechanical 16 "1" at 1900,1503.35 h77.5 r90; Mechanical 16 "6" at 1900,2206.14 h77.5 r90
"Serial Prog": Top Overlay "1" at 240,323.35 h77.5 r90; Top Overlay "6" at 240,1026.14 h77.5 r90; Mechanical 40 "2.540" at 220,124.02 h15.5 r90; Mechanical 40 "2.540" at 147.52,344.02 h15.5 r90; Mechanical 40 "15.240" at 387.52,663.5 h15.5 r90; Mechanical 40 "12.700" at 90,663.5 h15.5 r90; Mechanical 16 "1" at 240,323.35 h77.5 r90; Mechanical 16 "6" at 240,1026.14 h77.5 r90
"Term Res": Top Overlay "1" at 2438.35,750 h77.5; Top Overlay "2" at 2741.14,750 h77.5; Mechanical 40 "2.540" at 2239.02,770 h15.5; Mechanical 40 "2.540" at 2456.5,900 h15.5; Mechanical 40 "5.080" at 2584.02,602.48 h15.5; Mechanical 16 "1" at 2438.35,750 h77.5; Mechanical 16 "2" at 2741.14,750 h77.5